# Altium PCB Aux_Lights_Daughter_REV2_1.PcbDoc
Units mil, origin at the board's own origin, x right, y up, seen from the top; angles counter-clockwise.
Board outline 2365 x 1945 mil, 2 copper layers (Top Layer, Bottom Layer); 19 components, 20 nets, 146 pads, 25 vias.
Unrouted connection lines stored in the file: 4.
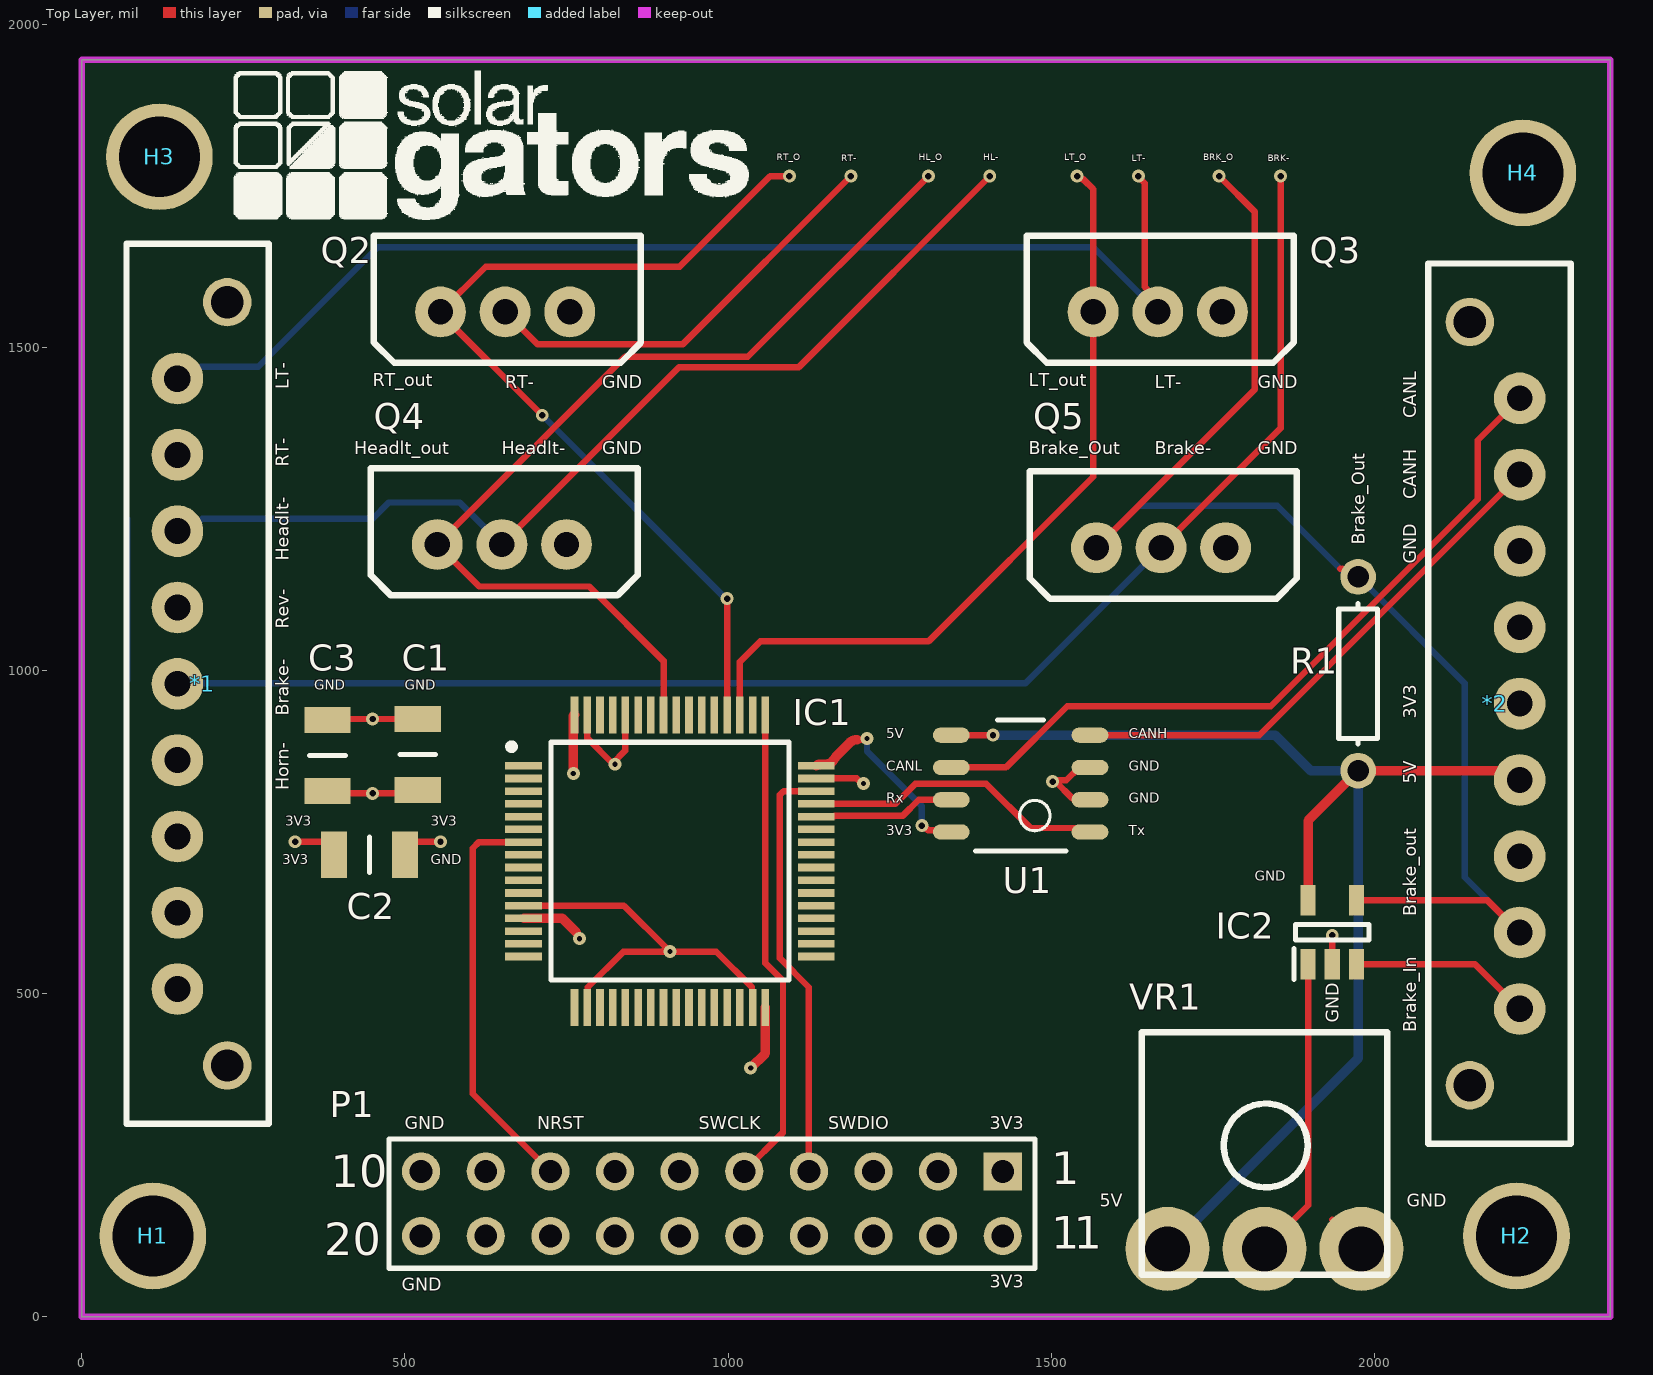
[diagram p0: Top Layer view]
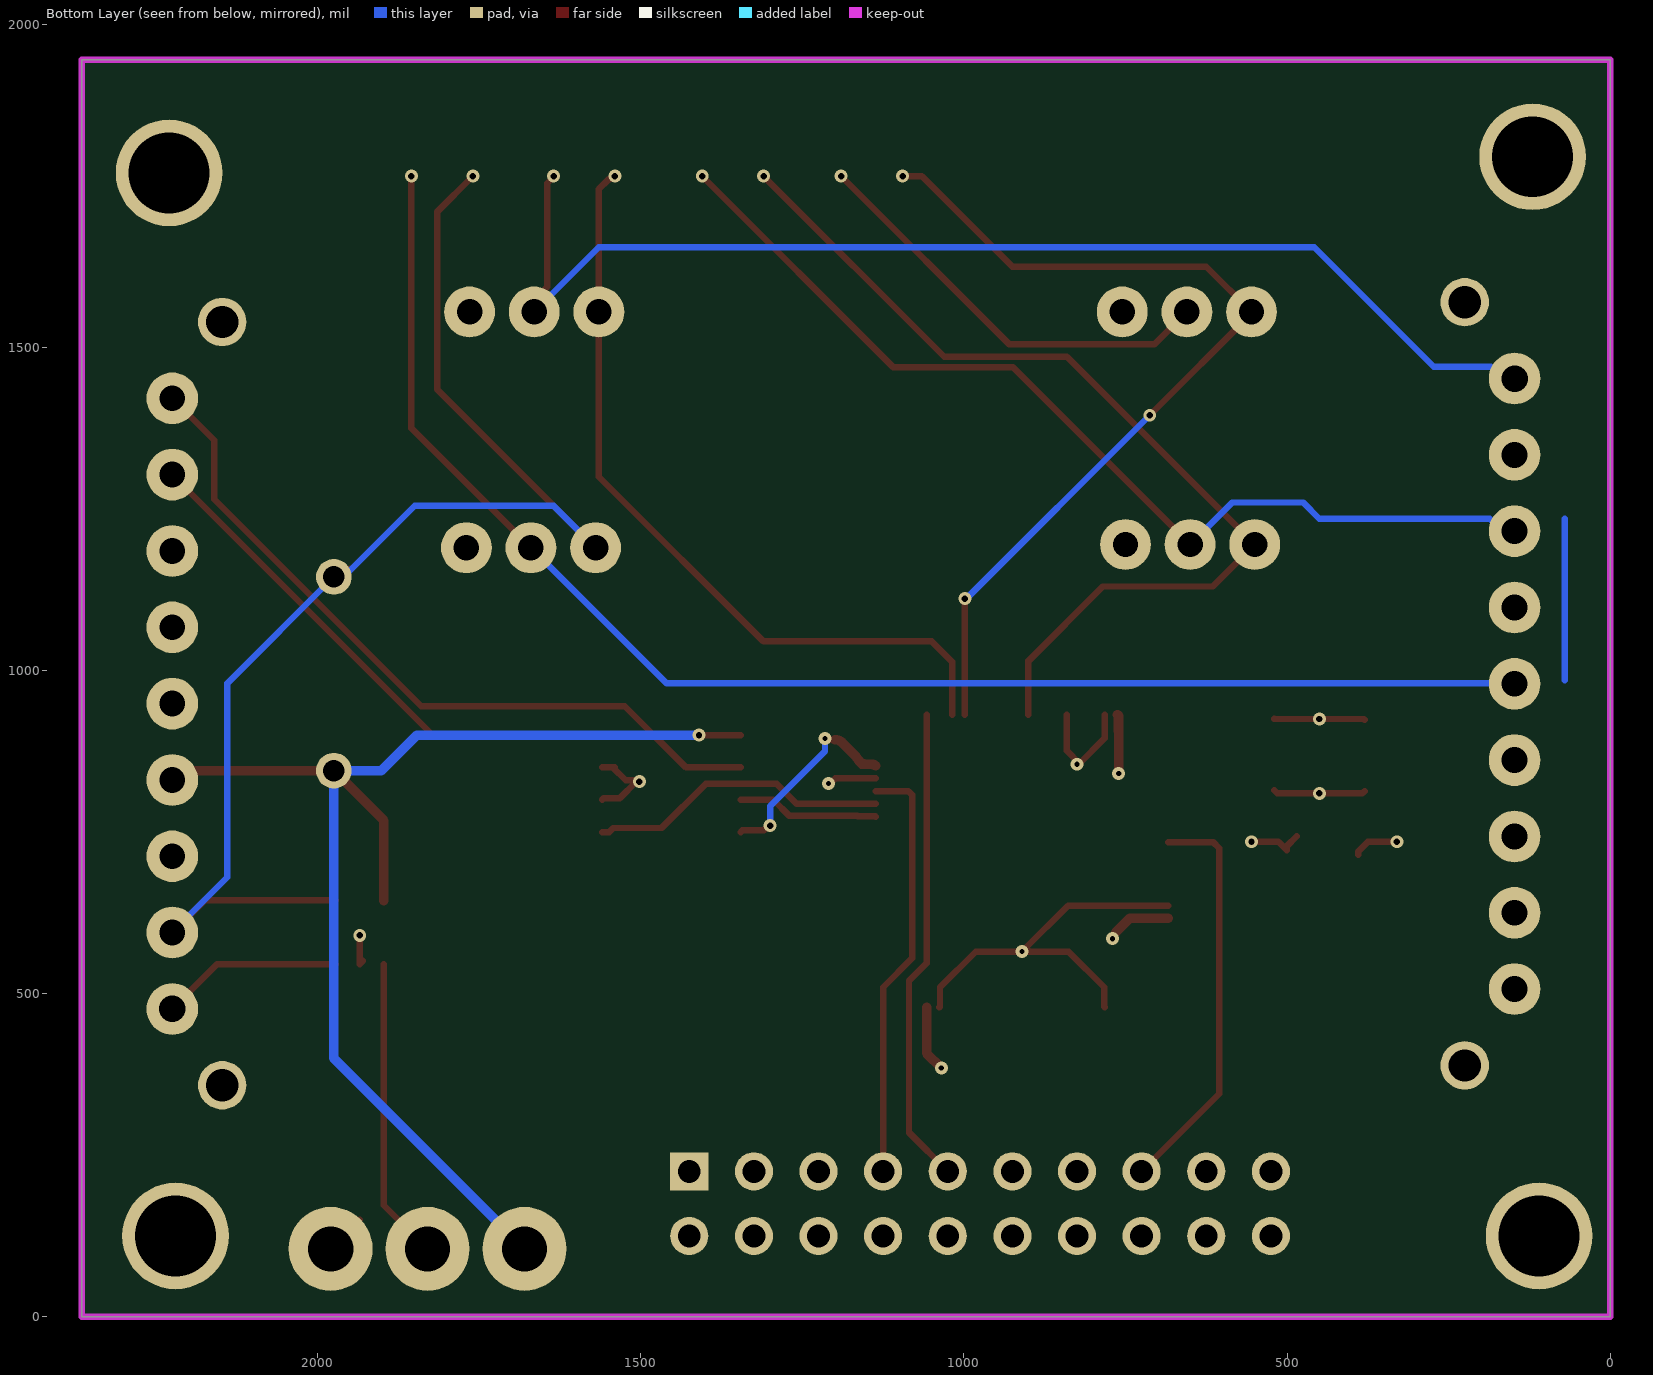
[diagram p1: Bottom Layer view, seen from below]

## Layer stack, top to bottom
Top Solder: solder mask 0.4, Solder Resist, Dk 3.5
Top Layer: signal copper 1.4
Dielectric 1: dielectric 12.6, FR-4, Dk 4.8
Bottom Layer: signal copper 1.4
Bottom Solder: solder mask 0.4, Solder Resist, Dk 3.5

## Board outline
0,0 2365,0 2365,1945 0,1945

## Design rules (kind name [scope] priority, off if disabled: settings)
Clearance Clearance_2 [InNamedPolygon('Top Layer-3V3')] p1: gap=10 ignorepadtopadclearanceinfootprint=FALSE except(0: Arc-Hole Track-Hole SMDPad-Hole THPad-Hole Via-Hole Fill-Hole Poly-Hole Region-Hole Text-Hole; 6: Fill-Fill Fill-Poly Fill-Region Poly-Poly Poly-Region Region-Region)
Clearance Clearance_1 [InNamedPolygon('Bottom Layer-GND')] p2: gap=10 ignorepadtopadclearanceinfootprint=FALSE except(0: Arc-Hole Track-Hole SMDPad-Hole THPad-Hole Via-Hole Fill-Hole Poly-Hole Region-Hole Text-Hole; 6: Fill-Fill Fill-Poly Fill-Region Poly-Poly Poly-Region Region-Region)
Clearance [All] p3: gap=10 ignorepadtopadclearanceinfootprint=FALSE except(0: Arc-Hole Track-Hole SMDPad-Hole THPad-Hole Via-Hole Fill-Hole Poly-Hole Region-Hole Text-Hole; 5: SMDPad-SMDPad; 6: Arc-Arc Arc-Track Arc-SMDPad Arc-THPad Arc-Fill Arc-Poly Arc-Region Track-Track Track-SMDPad Track-THPad Track-Fill Track-Poly Track-Region; 7: Fill-Fill Fill-Poly Fill-Region Poly-Poly Poly-Region Region-Region)
PolygonConnect [All] p1: connectstyle=Relief reliefconductorwidth=10 reliefentries=4 polygonreliefangle="90 Angle" airgapwidth=10
RoutingVias [All] p1: holewidth=28 width=50 viastyle="Through Hole" minholewidth=28 minwidth=50 maxholewidth=28 maxwidth=50
SolderMaskExpansion [All] p1: expansion=4 istentingtop=FALSE
Width [All] p1: maxlimit=20 minlimit=10 preferedwidth=10
30 further rules are at their usual default settings.

## Components (designator, comment, footprint, x,y, rotation, side; value= is the part's Value field where it differs from the comment)
*1 "9-Pin Connector" 9-Pin 289.57,298.35 r90 top
*2 "9-Pin Connector" 9-Pin 2083.27,1629.88 r270 top
C1 "C1206C104K5RAC7867" CAPC3216X110N 520,870 r90 top
C2 "C1206C104K5RAC7867" CAPC3216X110N 445,715 r0 top
C3 "C1206C104K5RAC7867" CAPC3216X110N 380,868.39 r90 top
H1 "Hole 125mil" "Hole 125mil" 110,125 r90 top
H2 "Hole 125mil" "Hole 125mil" 2220,125 r90 top
H3 "Hole 125mil" "Hole 125mil" 120,1795 r90 top
H4 "Hole 125mil" "Hole 125mil" 2230,1770 r90 top
IC1 "STM32F072RBT6" QFP50P1200X1200X160-64N 910,705 r0 top
IC2 "LM397MF_NOPB" SOT95P280X145-5N 1935,595 r90 top
P1 "Programmer Header" HDR2X10_CEN 1425,225 r180 top
Q2 "13N06L" 13N06L 755,1555 r180 top
Q3 "13N06L" 13N06L 1765,1555 r180 top
Q4 "13N06L" 13N06L 750,1195 r180 top
Q5 "13N06L" 13N06L 1770,1190 r180 top
R1 "Res1" AXIAL-0.3 1975,995 r90 top value=100k
U1 "TCAN1042HV" CANIC 1242.72,855 r180 top
VR1 "P160KN-0QC17B10K" "POT inline wide" 1730,105 r0 top

## Footprints (in the part's own frame and the unit in brackets; to place one, negate y for a bottom-side part, rotate by r counter-clockwise, add the part's x,y. Pads: shape width x height; smd on the part's side, far side on the other; paste and mask are expansions set on the pad)
9-Pin [mil]
  round 80 hole 41: 1(1153.54,141.73)
  round 80 hole 40: 2(1035.43,141.73) 3(917.32,141.73) 4(799.21,141.73) 5(681.1,141.73) 6(562.99,141.73) 7(444.88,141.73) 8(326.77,141.73) 9(208.66,141.73)
  round 75 hole 50: 10(90.55,64.57) 11(1271.65,64.57)
  silkscreen extent 0,0 1362,220
13N06L [mm]
  round 2 hole 1: D(2.54,0) G(5.08,0) S(0,0)
  silkscreen extent -2.8,-3 7.7,2
AXIAL-0.3 [mm] "Axial Device, Thru-Hole; 2 Leads; 0.3 in Pin Spacing"
  round 1.4 hole 0.85: 1(-3.81,0) 2(3.81,0)
  silkscreen extent -2.77,-0.76 2.77,0.76
CANIC [mm]
  oval 1.45x0.6 smd paste+0 mask+0.051: 1(-8.059,2.667) 2(-8.059,1.397) 3(-8.059,0.127) 4(-8.059,-1.143) 5(-2.609,-1.143) 6(-2.609,0.127) 7(-2.609,1.397) 8(-2.609,2.667)
  silkscreen extent -7.11,-1.74 -3.56,3.4, body extent -7.29,-1.68 -3.38,3.53, height 1.75
CAPC3216X110N [mm]
  rect 1.02x1.82 smd: 1(-1.4,0) 2(1.4,0)
  silkscreen extent 0,-0.7 0,0.7, body extent -1.6,-0.8 1.6,0.8, height 1.1
HDR2X10_CEN [mm] "Connector; Header; 10x2 Position"
  rect 1.5x1.5 hole 0.9: 1(0,0)
  round 1.5 hole 0.9: 2(2.54,0) 3(5.08,0) 4(7.62,0) 5(10.16,0) 6(12.7,0) 7(15.24,0) 8(17.78,0) 9(20.32,0) 10(22.86,0) 11(0,2.54) 12(2.54,2.54) 13(5.08,2.54) 14(7.62,2.54) 15(10.16,2.54) 16(12.7,2.54) 17(15.24,2.54) 18(17.78,2.54) 19(20.32,2.54) 20(22.86,2.54)
  silkscreen extent -1.27,-1.27 24.13,3.81
"Hole 125mil" [mil]
  round 165 hole 125: 1(0,0)
"POT inline wide" [mil]
  round 130 hole 70: 1(-50,0) 2(100,0) 3(250,0)
  silkscreen extent -90,-40 290,335
QFP50P1200X1200X160-64N [mm]
  rect 1.45x0.3 smd: 1(-5.75,3.75) 2(-5.75,3.25) 3(-5.75,2.75) 4(-5.75,2.25) 5(-5.75,1.75) 6(-5.75,1.25) 7(-5.75,0.75) 8(-5.75,0.25) 9(-5.75,-0.25) 10(-5.75,-0.75) 11(-5.75,-1.25) 12(-5.75,-1.75) 13(-5.75,-2.25) 14(-5.75,-2.75) 15(-5.75,-3.25) 16(-5.75,-3.75) 33(5.75,-3.75) 34(5.75,-3.25) 35(5.75,-2.75) 36(5.75,-2.25) 37(5.75,-1.75) 38(5.75,-1.25) 39(5.75,-0.75) 40(5.75,-0.25) 41(5.75,0.25) 42(5.75,0.75) 43(5.75,1.25) 44(5.75,1.75) 45(5.75,2.25) 46(5.75,2.75) 47(5.75,3.25) 48(5.75,3.75)
  rect 0.3x1.45 smd: 17(-3.75,-5.75) 18(-3.25,-5.75) 19(-2.75,-5.75) 20(-2.25,-5.75) 21(-1.75,-5.75) 22(-1.25,-5.75) 23(-0.75,-5.75) 24(-0.25,-5.75) 25(0.25,-5.75) 26(0.75,-5.75) 27(1.25,-5.75) 28(1.75,-5.75) 29(2.25,-5.75) 30(2.75,-5.75) 31(3.25,-5.75) 32(3.75,-5.75) 49(3.75,5.75) 50(3.25,5.75) 51(2.75,5.75) 52(2.25,5.75) 53(1.75,5.75) 54(1.25,5.75) 55(0.75,5.75) 56(0.25,5.75) 57(-0.25,5.75) 58(-0.75,5.75) 59(-1.25,5.75) 60(-1.75,5.75) 61(-2.25,5.75) 62(-2.75,5.75) 63(-3.25,5.75) 64(-3.75,5.75)
  silkscreen extent -6.35,-4.68 4.68,4.68, body extent -6,-6 6,6, height 1.6
SOT95P280X145-5N [mm]
  rect 1.2x0.6 smd: 1(-1.25,0.95) 2(-1.25,0) 3(-1.25,-0.95) 4(1.25,-0.95) 5(1.25,0.95)
  silkscreen extent -1.85,-1.45 0.3,1.5, body extent -1.4,-1.45 1.4,1.45, height 1.45

## Part data
C1 C2 C3: "Capacitor", Manufacturer_Name=Kemet, Mouser2 Part Number=80-C1206104K5RAC7867, Datasheet Link=https://componentsearchengine.com/Datasheets/1/C1206C104K5RAC7867.pdf, Height=1.1mm, Manufacturer_Part_Number=C1206C104K5RAC7867, Mouser2 Price/Stock=https://www.mouser.com/Search/Refine.aspx?Keyword=80-C1206104K5RAC7867
IC1: "Integrated Circuit", Manufacturer_Name=STMicroelectronics, Mouser Part Number=511-STM32F072RBT6, Datasheet Link=https://componentsearchengine.com/Datasheets/1/STM32F072RBT6.pdf, Height=1.6mm, Manufacturer_Part_Number=STM32F072RBT6, Mouser Price/Stock=https://www.mouser.com/Search/Refine.aspx?Keyword=511-STM32F072RBT6
IC2: "Integrated Circuit", Manufacturer_Name="Texas Instruments", Manufacturer_Part_Number=LM397MF/NOPB, Mouser Part Number=926-LM397MF/NOPB, Datasheet Link=http://www.ti.com/lit/ds/symlink/lm397.pdf, Height=1.45mm, Mouser Price/Stock=https://www.mouser.com/Search/Refine.aspx?Keyword=926-LM397MF%2FNOPB
P1: library part "Header 10X2A", "Header, 10-Pin, Dual row", LatestRevisionDate=17-Jul-2002, LatestRevisionNote="Re-released for DXP Platform.", Publisher="Altium Limited"
R1: "Resistor", LatestRevisionDate=17-Jul-2002, LatestRevisionNote="Re-released for DXP Platform.", PackageDescription="Axial Device, Thru-Hole; 2 Leads; 0.3 in Pin Spacing", PackageReference=AXIAL-0.3, Published=8-Jun-2000, Publisher="Altium Limited"
U1: "TCAN1042Fault ProtectedCAN Transceiverwith CAN FD", ComponentLink1Description=Datasheet, ComponentLink1URL=http://www.ti.com/lit/ds/symlink/tcan1042hgv.pdf
VR1: "Variable Resistor", Manufacturer_Name="BI Technologies", Mouser Part Number=858-P160KN-OQC17B10K, Datasheet Link=https://componentsearchengine.com/Datasheets/1/P160KN-0QC17B10K.pdf, Height=16.5mm, Manufacturer_Part_Number=P160KN-0QC17B10K, Mouser Price/Stock=https://www.mouser.com/Search/Refine.aspx?Keyword=858-P160KN-OQC17B10K

## Via types
v1: diameter 20, hole 10, Top Layer to Bottom Layer, 18 vias
v2: diameter 20, hole 8, Top Layer to Bottom Layer, 7 vias

## Nets (pads, with @x,y where several pads share a name; then routed paths per layer and width w, separated by ;. In a path a pad name is that pad's centre, name@x,y a point inside that pad or via, vN(x,y) a via of type N, cw(c..) or ccw(c..) an arc to the next point about the centre after c; other vN are vias at no path point)
3V3: *2.5 C1.1 C2.1 C3.1 IC1.13 IC1.19 IC1.32 IC1.48 IC1.64 P1.1 P1.11 U1.8 | length 839.6
  Top Layer w10: v1(330,735) 374.8,735 389.88,719.92 C2.1 ; C3.1 383.27,810 v1(450,810) 515.12,810 C1.1 ; v2@758.68,838.68 v2(760.52,840.52) ; IC1.48 IC1.48@1159.02,852.64 ; 1199.46,893.09 1213.09,893.09 v2(1215,895) ; v1(1300,760) 1302.71,760 1310.1,752.61 1342.83,752.61 U1.8
  Top Layer w15: IC1.13 743.58,616.42 765,595 ; v2(760.52,840.52) 760.52,905.7 760.77,905.94 760.77,929.78 IC1.64 ; v2(1035,385) 1057.64,407.64 IC1.32 ; IC1.48 cw(c1144.53,840.05) 1145.53,855.01 1149.78,854.73 ccw(c1150.76,869.7) 1162.81,860.78 1167.94,867.71 cw(c1180,858.79) 1169.39,869.39 1188.68,888.68 cw(c1199.3,878.09) 1199.22,893.09 1199.3,893.09 1199.46,893.09
  Bottom Layer w10: v2(1215,895) 1215,875 1300,790 v1(1300,760)
  other v2: 770,585
5V: *2.4 IC2.5 R1.1 U1.5 VR1.1 | length 2003.3
  Top Layer w10: U1.5 v1(1410,900) ; *2.4@2191.73,845 2206.06,830.67 *2.4
  Top Layer w15: IC2.5 1897.6,767.6 R1.1 *2.4@2191.73,845
  Bottom Layer w15: v1(1410,900) 1846.67,900 1901.67,845 R1.1 1975,400 VR1.1
Brake-: *1.5 Q5.D | length 2248.6
  Top Layer w10: Q5.D 1855,1375 v1(1855,1765)
  Bottom Layer w10: *1.5@160,980 1460,980 Q5.D
Brake_In: *2.1 IC2.3 | length 281.4
  Top Layer w10: IC2.3 2155.55,545.79 *2.1
Brake_Out: *2.2 IC2.4 Q5.G R1.2 | length 2132.8
  Top Layer w10: Q5.G 1815.37,1435.37 1815.37,1709.63 v1(1760,1765) ; 1947.41,1157.59 1950.2,1157.59 1962.79,1145 R1.2 ; IC2.4 2175.24,644.21 *2.2
  Bottom Layer w10: Q5.G 1635,1255 1850,1255 R1.2@1967.5,1137.5 ; R1.2 2140,980 2140,680 2225,595 *2.2
CANH: *2.8 U1.4 | length 832
  Top Layer w10: U1.4 1821.89,900 *2.8
CANL: *2.9 U1.6 | length 1169.6
  Top Layer w10: U1.6 1430,850 1524.85,944.85 1839.85,944.85 2160,1265 2160,1356.22 *2.9
GND: *2.7 C1.2 C2.2 C3.2 IC1.12 IC1.18 IC1.31 IC1.47 IC1.60 IC1.63 IC2.2 P1.2 P1.3 P1.6 P1.7 P1.9 P1.10 P1.12 P1.13 P1.14 P1.15 P1.16 P1.17 P1.18 P1.19 P1.20 Q2.S Q3.S Q4.S Q5.S U1.2 U1.3 VR1.3 | length 1369.4
  Top Layer w10: C3.2 381.5,925 v1(450,925) 519.88,925 C1.2 ; C2.2@485.04,743.56 500.12,728.48 500.12,721.74 513.38,735 v1(555,735) ; IC1.12 838.9,636.1 907.29,567.71 907.29,566.91 901.02,566.91 v2@900.62,567.31 ; IC1.18 782.95,479.53 782.95,509.85 838.1,565 v2(910,565) 981.9,565 1037.05,509.85 1037.05,479.53 IC1.31 ; IC1.63 782.05,895.45 v2@822.5,855 ; v2@820,855 841.1,876.1 IC1.60 ; v2@823.65,856.35 822.29,855 v2@822.5,855 ; v2(825,855) v2@822.5,855 ; IC1.47 1198.99,832.95 1206.66,825.27 v2(1209.37,825.27) ; U1.3@1540.6,850 U1.3@1543.27,850 ; U1.2 1557.39,802.61 1532.39,802.61 1506.91,828.09 v1(1502.34,828.09) 1504.26,830 1523.27,830 U1.3@1543.27,850 ; U1.3 U1.3@1543.27,850 ; Q3.S Q3.S@1765,1560 ; IC2.2@1930,550.79 IC2.2 v1(1935,590) ; VR1.3@1935,150 VR1.3
Headlights-: *1.3 Q4.D | length 1538.6
  Top Layer w10: Q4.D 924.62,1469.62 1109.62,1469.62 v1(1405,1765)
  Bottom Layer w10: *1.3 166.78,1215.67 186.11,1235 450,1235 475,1260 585,1260 Q4.D
Headlights_out: IC1.57 Q4.G | length 1507.1
  Top Layer w10: IC1.57 900.16,1014.84 785,1130 615,1130 Q4.G 840.62,1485.62 1030.62,1485.62 v1(1310,1765) ; v1@1308.26,1762.91 v1@1310.18,1764.82
LT-: *1.1 Q3.D | length 1852.8
  Top Layer w10: v1(1635,1765) 1635,1764.14 1645,1754.14 1645,1593.6 1665,1573.6 Q3.D
  Bottom Layer w10: *1.1@160,1452.44 167.33,1452.44 184.89,1470 273.04,1470 458.04,1655 1565,1655 Q3.D
LT_out: IC1.51 Q3.G | length 1225.7
  Top Layer w10: IC1.51 1018.27,1013.27 1050,1045 1310,1045 1565,1300 Q3.G 1565,1745 1550,1760 1547.71,1760 1542.71,1765 v1(1540,1765)
NetIC2_1: IC2.1 VR1.2 | length 468.8
  Top Layer w10: VR1.2 1897.6,172.6 IC2.1
NRST_pgm15: IC1.7 P1.8 | length 632.3
  Top Layer w10: IC1.7 614.53,734.53 605,725 605,345 P1.8
RT-: *1.2 Q2.D | length 663.7
  Top Layer w10: Q2.D 705.37,1504.63 929.63,1504.63 v1(1190,1765)
RT_out: IC1.52 Q2.G | length 1435.8
  Top Layer w10: v1(712.5,1395) 555,1552.5 Q2.G 625,1625 925,1625 1065,1765 v1(1095,1765) ; IC1.52 v1(998.58,1111.42)
  Bottom Layer w10: v1(712.5,1395) 996.08,1111.42 v1(998.58,1111.42)
Rx: IC1.44 U1.7 | length 219.9
  Top Layer w10: IC1.44 1137.28,774.8 1164.66,774.8 1164.86,775 1270,775 1295,800 U1.7
SWCLK_pgm9: IC1.49 P1.5 | length 742.6
  Top Layer w10: P1.5 1085,285 1085,520 1057.64,547.36 IC1.49
SWDIO_pgm7: IC1.46 P1.4 | length 659.9
  Top Layer w10: P1.4 1125,510 1080,555 1080,807.41 1085.86,813.27 IC1.46
Tx: IC1.45 U1.1 | length 467.7
  Top Layer w10: IC1.45 1258.58,793.58 1290,825 1399.22,825 1467.93,756.29 1542.68,756.29 1548.97,750 U1.1
pads on no net: *1.4 *1.6 *1.7 *1.8 *1.9 *1.10 *1.11 *2.3 *2.6 *2.10 *2.11 H1.1 H2.1 H3.1 H4.1 IC1.1 IC1.2 IC1.3 IC1.4 IC1.5 IC1.6 IC1.8 IC1.9 IC1.10 IC1.11 IC1.14 IC1.15 IC1.16 IC1.17 IC1.20 IC1.21 IC1.22 IC1.23 IC1.24 IC1.25 IC1.26 IC1.27 IC1.28 IC1.29 IC1.30 IC1.33 IC1.34 IC1.35 IC1.36 IC1.37 IC1.38 IC1.39 IC1.40 IC1.41 IC1.42 IC1.43 IC1.50 IC1.53 IC1.54 IC1.55 IC1.56 IC1.58 IC1.59 IC1.61 IC1.62
copper on no net: | length 262.6
  Bottom Layer w10: 70,985.16 70,1235 ; 138.82,870.35 147.83,861.34

## Polygon pours and split planes (outlines as drawn)
3V3 on Top Layer "Top Layer-3V3" (solid, shelved, pour order 0): 0,0 0,1945 2365,1945 2365,0
GND on Bottom Layer "Bottom Layer-GND" (solid, shelved, pour order 2): 0,0 0,1945 2365,1945 2365,0

## Keep-outs
Keep-Out Layer:
  the board outline again, w10

## Silkscreen, mask and mechanical layers (free items; w line width, h text height)
Top Overlay:
  drawing of 2657 lines, arcs and shapes, not listed
  text "RT_O" at 1075,1790 h10
  text "HL_O" at 1295,1790 h10
  text "HL-" at 1395,1790 h10
  text "LT_O" at 1520,1790 h10
  text "BRK_O" at 1735,1790 h10
  text "RT-" at 1175,1788.33 h10
  text "LT-" at 1625,1788.33 h10
  text "BRK-" at 1835,1788.33 h10
  text "RT_out" at 450,1440 h20
  text "LT_out" at 1465,1440 h20
  text "RT-" at 655,1436.67 h20
  text "GND" at 805,1436.67 h20
  text "LT-" at 1660,1436.67 h20
  text "GND" at 1820,1436.67 h20
  text "LT-" at 320,1435 h20 r90
  text "CANL" at 2065,1390 h20 r90
  text "Headlt_out" at 421.68,1335 h20
  text "Headlt-" at 650,1335 h20
  text "GND" at 805,1335 h20
  text "Brake_Out" at 1465,1335 h20
  text "Brake-" at 1660,1335 h20
  text "GND" at 1820,1335 h20
  text "RT-" at 320,1315 h20 r90
  text "CANH" at 2065,1265 h20 r90
  text "Brake_Out" at 1985,1195 h20 r90
  text "Headlt-" at 320,1170 h20 r90
  text "GND" at 2065,1165 h20 r90
  text "Rev-" at 320,1065 h20 r90
  text "GND" at 360,970 h15
  text "GND" at 500,970 h15
  text "Brake-" at 320,930 h20 r90
  text "3V3" at 2065,925 h20 r90
  text "5V" at 1245,895 h15
  text "CANH" at 1620,895 h15
  text "CANL" at 1245,845 h15
  text "GND" at 1620,845 h15
  text "5V" at 2065,825 h20 r90
  text "Horn-" at 320,815 h20 r90
  text "Rx" at 1245,795 h15
  text "GND" at 1620,795 h15
  text "3V3" at 315,760 h15
  text "3V3" at 540,760 h15
  text "3V3" at 1245,745 h15
  text "Tx" at 1620,745 h15
  text "3V3" at 310,700 h15
  text "GND" at 540,700 h15
  text "GND" at 1815,675 h15
  text "Brake_out" at 2065,620 h20 r90
  text "GND" at 1945,455 h20 r90
  text "Brake_In" at 2065,440 h20 r90
  text "GND" at 500,290 h20
  text "NRST" at 705,290 h20
  text "SWCLK" at 955,290 h20
  text "SWDIO" at 1155,290 h20
  text "3V3" at 1405,290 h20
  text "5V" at 1575,170 h20
  text "GND" at 2050,170 h20
  text "3V3" at 1405,45 h20
  text "GND" at 495,40 h20

## Text inside footprints (layer, text, board x,y; h text height)
P1: Top Overlay "20" at 375,95 h50; Top Overlay "10" at 385,200 h50; Top Overlay "1" at 1500,105 h50; Top Overlay "1" at 1535,105 h50; Top Overlay "1" at 1500,205 h50